# Altium PCB AX301_AX4010.PcbDoc (part 7 of 10)
Units mil, origin at the board's own origin, x right, y up, seen from the top; angles counter-clockwise.
Board outline 5185 x 3614 mil, 4 copper layers (Top Layer, GND, Mid-Layer 1, Bottom Layer); 191 components, 338 nets, 1108 pads, 420 vias.
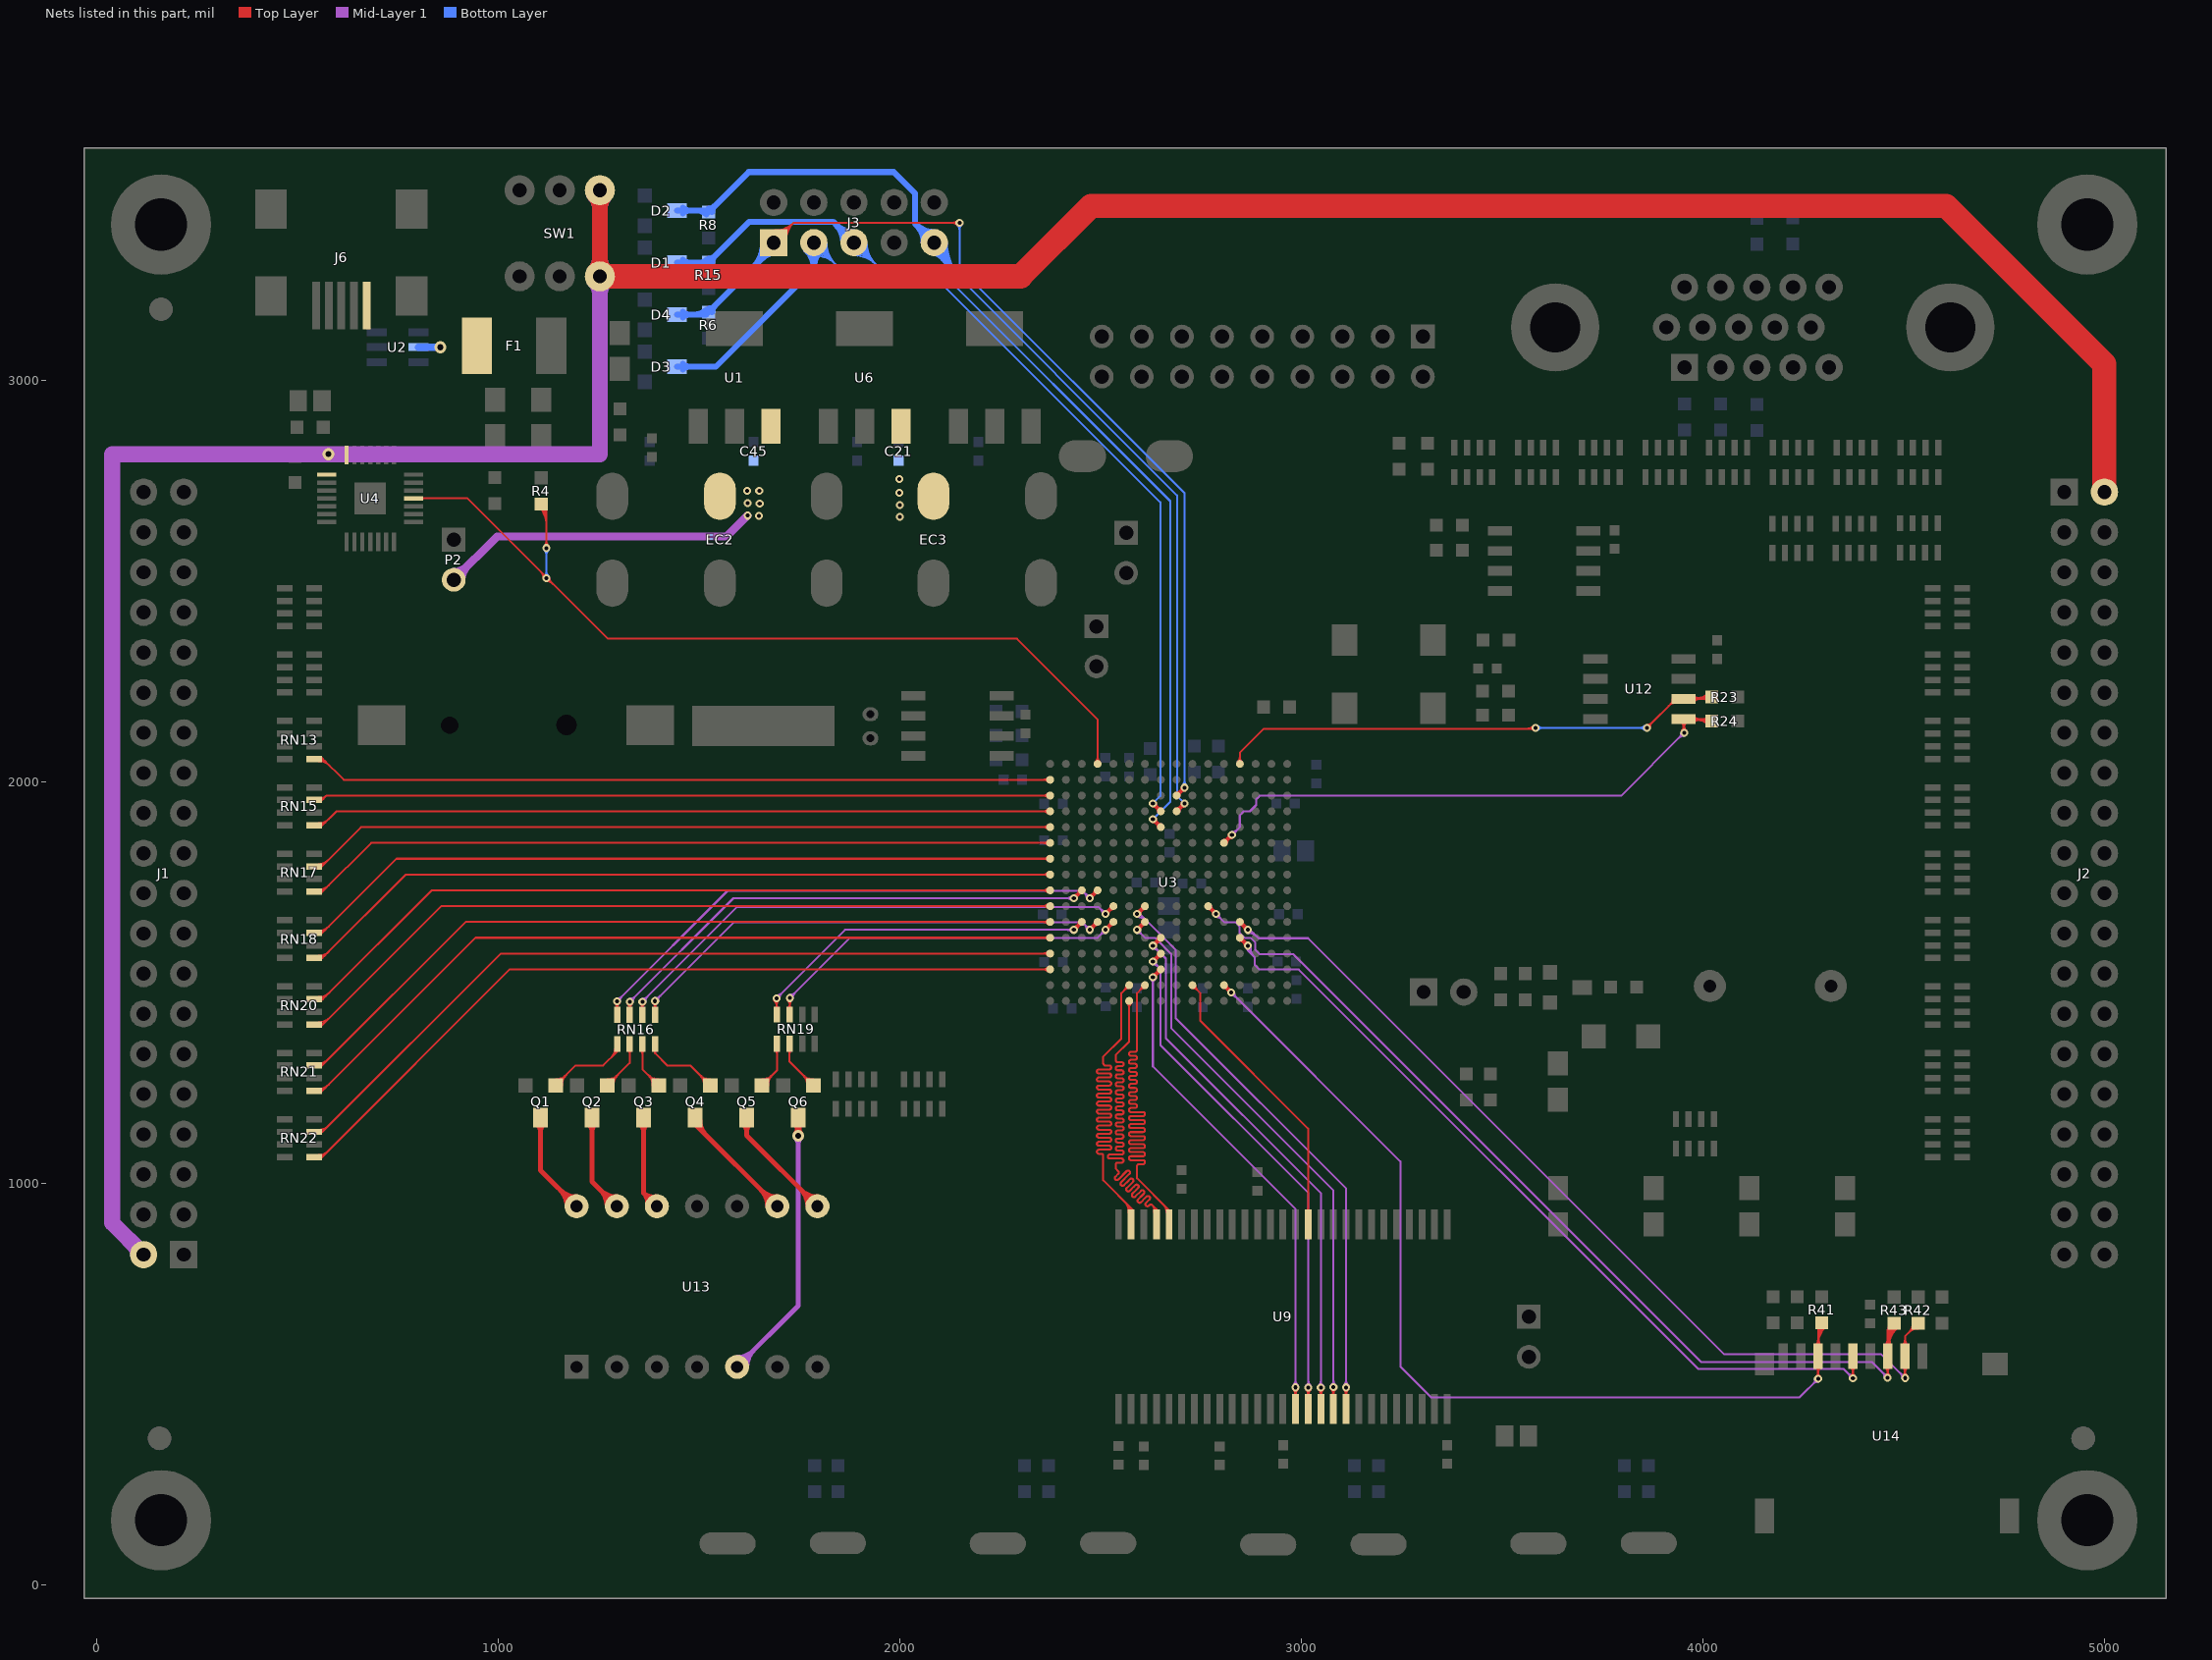
[diagram p9: the nets of this part, all layers, seen from the top]

## Via types
v1: diameter 20, hole 10, Top Layer to Bottom Layer, 377 vias
v2: diameter 30, hole 15, Top Layer to Bottom Layer, 41 vias
v3: diameter 40, hole 20, Top Layer to Bottom Layer, 2 vias

## Nets (pads, with @x,y where several pads share a name; then routed paths per layer and width w, separated by ;. In a path a pad name is that pad's centre, name@x,y a point inside that pad or via, vN(x,y) a via of type N, cw(c..) or ccw(c..) an arc to the next point about the centre after c; other vN are vias at no path point) (continued)
S_DB13: U3.K15 U9.50 | length 1413.3
  Top Layer w5: U3.K15@2603.6,1493.09 cw(c2585.88,1493.09) 2598.41,1480.56 cw(c2610.94,1468.03) U3.K15@2610.94,1485.75 ; U3.K15@2610.94,1493.09 2591,1473.15 2591,1332 cw(c2586,1332) 2586,1327 2576.12,1327 ccw(c2576.12,1322) 2571.12,1322 ccw(c2576.12,1322) 2576.12,1317 2586,1317 cw(c2586,1312) 2591,1312 cw(c2586,1312) 2586,1307 2576.12,1307 ccw(c2576.12,1302) 2571.12,1302 ccw(c2576.12,1302) 2576.12,1297 2586,1297 cw(c2586,1292) 2591,1292 cw(c2586,1292) 2586,1287 2576.12,1287 ccw(c2576.12,1282) 2571.12,1282 ccw(c2576.12,1282) 2576.12,1277 2586,1277 cw(c2586,1272) 2591,1272 cw(c2586,1272) 2586,1267 2576.12,1267 ccw(c2576.12,1262) 2571.12,1262 ccw(c2576.12,1262) 2576.12,1257 2586,1257 cw(c2586,1252) 2591,1252 cw(c2586,1252) 2586,1247 2576.12,1247 ccw(c2576.12,1242) 2571.12,1242 ccw(c2576.12,1242) 2576.12,1237 2586,1237 cw(c2586,1232) 2591,1232 cw(c2586,1232) 2586,1227 2576.12,1227 ccw(c2576.12,1222) 2571.12,1222 ccw(c2576.12,1222) 2576.12,1217 2586,1217 cw(c2586,1212) 2591,1212 cw(c2586,1212) 2586,1207 2576.12,1207 ccw(c2576.12,1202) 2571.12,1202 ccw(c2576.12,1202) 2576.12,1197 2586,1197 cw(c2586,1192) 2591,1192 cw(c2586,1192) 2586,1187 2576.12,1187 ccw(c2576.12,1182) 2571.12,1182 ccw(c2576.12,1182) 2576.12,1177 2605.88,1177 cw(c2605.88,1172) 2610.88,1172 cw(c2605.88,1172) 2605.88,1167 2576.12,1167 ccw(c2576.12,1162) 2571.12,1162 ccw(c2576.12,1162) 2576.12,1157 2605.88,1157 cw(c2605.88,1152) 2610.88,1152 cw(c2605.88,1152) 2605.88,1147 2576.12,1147 ccw(c2576.12,1142) 2571.12,1142 ccw(c2576.12,1142) 2576.12,1137 2605.88,1137 cw(c2605.88,1132) 2610.88,1132 cw(c2605.88,1132) 2605.88,1127 2576.12,1127 ccw(c2576.12,1122) 2571.12,1122 ccw(c2576.12,1122) 2576.12,1117 2605.88,1117 cw(c2605.88,1112) 2610.88,1112 cw(c2605.88,1112) 2605.88,1107 2576.12,1107 ccw(c2576.12,1102) 2571.12,1102 ccw(c2576.12,1102) 2576.12,1097 2605.88,1097 cw(c2605.88,1092) 2610.88,1092 cw(c2605.88,1092) 2605.88,1087 2576.12,1087 ccw(c2576.12,1082) 2571.12,1082 ccw(c2576.12,1082) 2576.12,1077 2605.88,1077 cw(c2605.88,1072) 2610.88,1072 cw(c2605.88,1072) 2605.88,1067 2576.12,1067 ccw(c2576.12,1062) 2571.12,1062 ccw(c2576.12,1062) 2576.12,1057 2605.88,1057 cw(c2605.88,1052) 2610.88,1052 cw(c2605.88,1052) 2605.88,1047 2596,1047 ccw(c2596,1042) 2591,1042 2591,1012 U9.50@2670.98,932.02 ; 2656.49,946.51 cw(c2635.98,926) U9.50@2664.98,926 ; 2665.02,937.98 cw(c2653.05,926) U9.50@2669.98,926 ; U9.50@2670.98,897 U9.50@2670.98,932.02 ; U9.50@2672,931 U9.50@2670.98,932.02
S_DB14: U3.L16 U9.51 | length 1418.6
  Top Layer w5: U3.L16@2566.38,1448.53 cw(c2553.85,1436) 2571.57,1436 cw(c2589.3,1436) U3.L16@2576.77,1448.53 ; U3.L16@2571.57,1453.72 2571.57,1352.57 2538,1319 2538,1306 ccw(c2543,1306) 2543,1301 2552.79,1301 cw(c2552.79,1296) 2557.79,1296 cw(c2552.79,1296) 2552.79,1291 2543,1291 ccw(c2543,1286) 2538,1286 ccw(c2543,1286) 2543,1281 2552.79,1281 cw(c2552.79,1276) 2557.79,1276 cw(c2552.79,1276) 2552.79,1271 2543,1271 ccw(c2543,1266) 2538,1266 ccw(c2543,1266) 2543,1261 2552.79,1261 cw(c2552.79,1256) 2557.79,1256 cw(c2552.79,1256) 2552.79,1251 2543,1251 ccw(c2543,1246) 2538,1246 ccw(c2543,1246) 2543,1241 2552.79,1241 cw(c2552.79,1236) 2557.79,1236 cw(c2552.79,1236) 2552.79,1231 2543,1231 ccw(c2543,1226) 2538,1226 ccw(c2543,1226) 2543,1221 2552.79,1221 cw(c2552.79,1216) 2557.79,1216 cw(c2552.79,1216) 2552.79,1211 2543,1211 ccw(c2543,1206) 2538,1206 ccw(c2543,1206) 2543,1201 2552.79,1201 cw(c2552.79,1196) 2557.79,1196 cw(c2552.79,1196) 2552.79,1191 2543,1191 ccw(c2543,1186) 2538,1186 ccw(c2543,1186) 2543,1181 2552.79,1181 cw(c2552.79,1176) 2557.79,1176 cw(c2552.79,1176) 2552.79,1171 2543,1171 ccw(c2543,1166) 2538,1166 ccw(c2543,1166) 2543,1161 2552.79,1161 cw(c2552.79,1156) 2557.79,1156 cw(c2552.79,1156) 2552.79,1151 2543,1151 ccw(c2543,1146) 2538,1146 ccw(c2543,1146) 2543,1141 2552.79,1141 cw(c2552.79,1136) 2557.79,1136 cw(c2552.79,1136) 2552.79,1131 2543,1131 ccw(c2543,1126) 2538,1126 ccw(c2543,1126) 2543,1121 2552.79,1121 cw(c2552.79,1116) 2557.79,1116 cw(c2552.79,1116) 2552.79,1111 2543,1111 ccw(c2543,1106) 2538,1106 ccw(c2543,1106) 2543,1101 2552.79,1101 cw(c2552.79,1096) 2557.79,1096 cw(c2552.79,1096) 2552.79,1091 2543,1091 ccw(c2543,1086) 2538,1086 ccw(c2543,1086) 2543,1081 2552.79,1081 cw(c2552.79,1076) 2557.79,1076 cw(c2552.79,1076) 2552.79,1071 2523.21,1071 ccw(c2523.21,1066) 2518.21,1066 ccw(c2523.21,1066) 2523.21,1061 2552.79,1061 cw(c2552.79,1056) 2557.79,1056 cw(c2552.79,1056) 2552.79,1051 2543,1051 ccw(c2543,1046) 2538,1046 2538,1036 2544.15,1029.85 cw(c2540.61,1026.32) 2544.15,1022.78 2537.23,1015.86 ccw(c2540.76,1012.33) 2537.23,1008.79 ccw(c2540.76,1012.33) 2544.3,1008.79 2565.21,1029.7 cw(c2568.74,1026.17) 2572.28,1029.7 cw(c2568.74,1026.17) 2572.28,1022.63 2551.37,1001.72 ccw(c2554.91,998.18) 2551.37,994.65 ccw(c2554.91,998.18) 2558.44,994.65 2568.9,1005.1 2573.45,1009.66 cw(c2576.99,1006.12) 2580.52,1009.66 cw(c2576.99,1006.12) 2580.52,1002.59 2565.51,987.58 ccw(c2569.05,984.04) 2565.51,980.51 ccw(c2569.05,984.04) 2572.58,980.51 2583.04,990.96 2586.78,994.7 cw(c2590.32,991.17) 2593.85,994.7 cw(c2590.32,991.17) 2593.85,987.63 2590.11,983.89 2579.65,973.44 ccw(c2583.19,969.9) 2579.65,966.36 ccw(c2583.19,969.9) 2586.73,966.36 2600.92,980.56 cw(c2604.46,977.03) 2607.99,980.56 cw(c2604.46,977.03) 2607.99,973.49 2604.25,969.75 2593.8,959.29 ccw(c2597.33,955.76) 2593.8,952.22 ccw(c2597.33,955.76) 2600.87,952.22 2611.32,962.68 2615.07,966.42 cw(c2618.6,962.88) 2622.14,966.42 cw(c2618.6,962.88) 2622.14,959.35 2613.47,950.68 ccw(c2617,947.14) 2613.47,943.61 ccw(c2617,947.14) 2620.54,943.61 2621.93,945 cw(c2625.46,941.46) 2629,945 ; U9.51@2633.69,927.54 ccw(c2616.21,932.2) 2629,945 ; 2635.13,938.87 cw(c2625.89,929.62) U9.51@2638.52,926.26 ; U9.51@2637.18,931.54 ccw(c2635.74,935) 2639.49,935 ; 2639,935 2629,945 ; U9.51@2639.49,897 2639.49,935 ; U9.51@2641.8,931.54 cw(c2643.24,935) 2639.49,935
S_DB15: U3.L15 U9.53 | length 1406.8
  Top Layer w5: 2558.12,955.88 cw(c2528.24,926) U9.53@2570.5,926 ; U3.L15@2564.23,1493.09 cw(c2546.51,1493.09) 2559.04,1480.56 cw(c2571.57,1468.03) U3.L15@2571.57,1485.75 ; 2566.65,947.35 cw(c2545.31,926) U9.53@2575.5,926 ; U3.L15@2571.57,1493.09 2552,1473.52 2552,1360 2507,1315 2507,1298 ccw(c2512,1298) 2512,1293 2521.93,1293 cw(c2521.93,1288) 2526.93,1288 cw(c2521.93,1288) 2521.93,1283 2496.07,1283 ccw(c2496.07,1278) 2491.07,1278 ccw(c2496.07,1278) 2496.07,1273 2521.93,1273 cw(c2521.93,1268) 2526.93,1268 cw(c2521.93,1268) 2521.93,1263 2496.07,1263 ccw(c2496.07,1258) 2491.07,1258 ccw(c2496.07,1258) 2496.07,1253 2521.93,1253 cw(c2521.93,1248) 2526.93,1248 cw(c2521.93,1248) 2521.93,1243 2496.07,1243 ccw(c2496.07,1238) 2491.07,1238 ccw(c2496.07,1238) 2496.07,1233 2521.93,1233 cw(c2521.93,1228) 2526.93,1228 cw(c2521.93,1228) 2521.93,1223 2496.07,1223 ccw(c2496.07,1218) 2491.07,1218 ccw(c2496.07,1218) 2496.07,1213 2521.93,1213 cw(c2521.93,1208) 2526.93,1208 cw(c2521.93,1208) 2521.93,1203 2496.07,1203 ccw(c2496.07,1198) 2491.07,1198 ccw(c2496.07,1198) 2496.07,1193 2521.93,1193 cw(c2521.93,1188) 2526.93,1188 cw(c2521.93,1188) 2521.93,1183 2496.07,1183 ccw(c2496.07,1178) 2491.07,1178 ccw(c2496.07,1178) 2496.07,1173 2521.93,1173 cw(c2521.93,1168) 2526.93,1168 cw(c2521.93,1168) 2521.93,1163 2496.07,1163 ccw(c2496.07,1158) 2491.07,1158 ccw(c2496.07,1158) 2496.07,1153 2521.93,1153 cw(c2521.93,1148) 2526.93,1148 cw(c2521.93,1148) 2521.93,1143 2496.07,1143 ccw(c2496.07,1138) 2491.07,1138 ccw(c2496.07,1138) 2496.07,1133 2521.93,1133 cw(c2521.93,1128) 2526.93,1128 cw(c2521.93,1128) 2521.93,1123 2496.07,1123 ccw(c2496.07,1118) 2491.07,1118 ccw(c2496.07,1118) 2496.07,1113 2521.93,1113 cw(c2521.93,1108) 2526.93,1108 cw(c2521.93,1108) 2521.93,1103 2496.07,1103 ccw(c2496.07,1098) 2491.07,1098 ccw(c2496.07,1098) 2496.07,1093 2521.93,1093 cw(c2521.93,1088) 2526.93,1088 cw(c2521.93,1088) 2521.93,1083 2496.07,1083 ccw(c2496.07,1078) 2491.07,1078 ccw(c2496.07,1078) 2496.07,1073 2502,1073 cw(c2502,1068) 2507,1068 2507,1007 U9.53@2581,933 ; 2575.19,938.81 cw(c2562.38,926) U9.53@2580.5,926
S_DQM0: U3.J14 U9.15 | length 1392.5
  Top Layer w6: v1@2981.05,486.05 cw(c2969.23,474.23) U9.15@2985.94,474.23 ; U9.15@2982.06,469.89 ccw(c2972.67,479.28) 2985.94,479.28 ccw(c2999.22,479.28) U9.15@2989.83,469.89 ; U9.15@2985.94,437 2985.94,490.94 v1(2986,491) ; U9.15@2985.94,473.97 cw(c3003.03,473.97) v1@2990.95,486.05
  Top Layer w10: v1(2630.63,1512.78) U3.J14@2650.32,1532.46 ; v1@2630.63,1517.78 ccw(c2630.63,1529.85) 2639.16,1521.31 ccw(c2647.7,1512.78) v1@2635.63,1512.78 ; U3.J14@2645.47,1532.46 cw(c2633.78,1532.46) 2642.05,1524.2 cw(c2650.32,1515.93) U3.J14@2650.32,1527.62
  Mid-Layer 1 w5: v1@2625.33,1507.48 cw(c2612.52,1494.67) 2630.63,1494.67 cw(c2648.74,1494.67) v1@2635.93,1507.48 ; v1(2630.63,1512.78) 2630.63,1290.37 2986,935 v1(2986,491) ; v1@2980.7,496.3 ccw(c2967.89,509.11) 2986,509.11 ccw(c3004.11,509.11) v1@2991.3,496.3
S_DQM1: U3.G15 U9.39 | length 766.1
  Top Layer w5: U3.G15@2729.06,1485.75 cw(c2729.06,1468.03) 2741.59,1480.56 cw(c2754.12,1493.09) U3.G15@2736.4,1493.09 ; U3.G15@2729.06,1493.09 2749,1473.15 2749,1404 3017.44,1135.56 U9.39@3017.44,897 ; U9.39@3013.2,930.24 ccw(c3002.96,940.49) 3017.44,940.49 ccw(c3031.93,940.49) U9.39@3021.68,930.24
S_NCAS: U3.J12 U9.17 | length 1497.3
  Top Layer w6: v1@3044.05,485.45 cw(c3032.25,473.65) U9.17@3048.94,473.65 ; U9.17@3045.05,469.89 ccw(c3035.66,479.28) 3048.94,479.28 ccw(c3062.22,479.28) U9.17@3052.83,469.89 ; U9.17@3048.94,437 3048.94,490.34 v1(3049,490.4) ; U9.17@3048.94,473.35 cw(c3066.05,473.35) v1@3053.95,485.45
  Top Layer w10: v1(2630.63,1591.52) U3.J12@2650.32,1611.2 ; v1@2630.63,1596.52 ccw(c2630.63,1608.59) 2639.16,1600.05 ccw(c2647.7,1591.52) v1@2635.63,1591.52 ; U3.J12@2645.47,1611.2 cw(c2633.78,1611.2) 2642.05,1602.94 cw(c2650.32,1594.67) U3.J12@2650.32,1606.36
  Mid-Layer 1 w5: v1@2630.63,1584.02 cw(c2630.63,1565.91) 2643.43,1578.72 cw(c2656.24,1591.52) v1@2638.13,1591.52 ; v1(2630.63,1591.52) 2663,1559.15 2663,1361 3049,975 v1(3049,490.4) ; v1@3043.7,495.7 ccw(c3030.89,508.51) 3049,508.51 ccw(c3067.11,508.51) v1@3054.3,495.7
S_NCS: U3.K10 U9.19 | length 1641.7
  Top Layer w6: v1@3106.98,485.98 cw(c3095.03,474.03) 3111.93,474.03 cw(c3128.83,474.03) v1@3116.88,485.98 ; U9.19@3108.04,469.89 ccw(c3098.65,479.28) 3111.93,479.28 ccw(c3125.21,479.28) U9.19@3115.82,469.89 ; U9.19@3111.93,437 v1(3111.93,490.93)
  Top Layer w10: v1(2591.26,1670.26) U3.K10@2610.94,1689.94 ; v1@2591.26,1675.26 ccw(c2591.26,1687.33) 2599.79,1678.79 ccw(c2608.33,1670.26) v1@2596.26,1670.26 ; U3.K10@2606.1,1689.94 cw(c2594.41,1689.94) 2602.68,1681.68 cw(c2610.94,1673.41) U3.K10@2610.94,1685.1
  Mid-Layer 1 w5: v1@2591.26,1662.76 cw(c2591.26,1626.59) 2616.84,1652.16 ; v1@2591.26,1667.76 cw(c2591.26,1643.66) 2608.3,1660.7 ; v1(2591.26,1670.26) 2598.74,1670.26 2688,1581 2688,1410 3111.93,986.07 v1(3111.93,490.93) ; v1@3106.63,496.23 ccw(c3093.82,509.04) 3111.93,509.04 ccw(c3130.04,509.04) v1@3117.23,496.23
S_NRAS: U3.K11 U9.18 | length 1580.5
  Top Layer w6: v1@3075.48,486.48 cw(c3063.53,474.53) 3080.43,474.53 cw(c3097.33,474.53) v1@3085.38,486.48 ; U9.18@3076.54,469.89 ccw(c3067.15,479.28) 3080.43,479.28 ccw(c3093.71,479.28) U9.18@3084.32,469.89 ; U9.18@3080.43,437 v1(3080.43,491.43)
  Top Layer w10: v1(2591.26,1630.89) U3.K11@2610.94,1650.57 ; v1@2591.26,1635.89 ccw(c2591.26,1647.96) 2599.79,1639.42 ccw(c2608.33,1630.89) v1@2596.26,1630.89 ; U3.K11@2606.1,1650.57 cw(c2594.41,1650.57) 2602.68,1642.31 cw(c2610.94,1634.04) U3.K11@2610.94,1645.73
  Mid-Layer 1 w5: v1@2591.26,1623.39 cw(c2591.26,1605.28) 2604.06,1618.09 cw(c2616.87,1630.89) v1@2598.76,1630.89 ; v1(2591.26,1630.89) 2611.15,1611 2636,1611 2676,1571 2676,1386 3080.43,981.57 v1(3080.43,491.43) ; v1@3075.13,496.74 ccw(c3062.33,509.54) 3080.43,509.54 ccw(c3098.54,509.54) v1@3085.74,496.74
S_NWE: U3.J13 U9.16 | length 1445.3
  Top Layer w6: v1@3013.05,485.45 cw(c3002.45,474.85) 3017.44,474.85 ; U9.16@3013.55,469.89 ccw(c3004.16,479.28) 3017.44,479.28 ccw(c3030.72,479.28) U9.16@3021.33,469.89 ; U9.16@3017.44,437 3017.44,489.84 v1(3018,490.4) ; U9.16@3017.44,472.15 cw(c3036.25,472.15) v1@3022.95,485.45
  Top Layer w10: v1(2630.63,1552.15) U3.J13@2650.32,1571.83 ; v1@2630.63,1557.15 ccw(c2630.63,1569.22) 2639.16,1560.68 ccw(c2647.7,1552.15) v1@2635.63,1552.15 ; U3.J13@2645.47,1571.83 cw(c2633.78,1571.83) 2642.05,1563.57 cw(c2650.32,1555.3) U3.J13@2650.32,1566.99
  Mid-Layer 1 w5: v1@2630.63,1544.65 cw(c2630.63,1526.54) 2643.43,1539.35 cw(c2656.24,1552.15) v1@2638.13,1552.15 ; v1(2630.63,1552.15) 2649,1533.78 2649,1344 3018,975 v1(3018,490.4) ; v1@3012.7,495.7 ccw(c2999.89,508.51) 3018,508.51 ccw(c3036.11,508.51) v1@3023.3,495.7
SCL: R23.2 U3.D1 U12.6 | length 1638.2
  Top Layer w5: U3.D1@2841.97,2049.47 ccw(c2829.44,2062) 2847.17,2062 ccw(c2864.89,2062) U3.D1@2852.36,2049.47 ; U3.D1@2847.17,2044.28 2847.17,2072.17 2907,2132 v1@3584,2132 ; 3561.06,2132 ccw(c3561.06,2156.93) v1@3578.7,2139.3 ; 3570.72,2132 cw(c3570.72,2120.72) v1@3578.7,2128.7 ; 3573.14,2132 ccw(c3573.14,2144.86) v1@3582.23,2135.77 ; v1(3861,2134) 3933,2206 U12.6@3953,2206 R23.2@4023,2206 ; v1@3861,2141.5 ccw(c3861,2159.61) 3873.8,2146.8 ccw(c3886.61,2134) v1@3868.5,2134 ; 3915.37,2188.37 cw(c3935,2168.74) U12.6@3935,2196.5 ; 3920.2,2193.2 ccw(c3907.39,2206) U12.6@3925.5,2206 ; U12.6@3923.9,2196.9 cw(c3935,2185.81) U12.6@3935,2201.5 ; U12.6@3973.82,2209.51 ccw(c3981.37,2218.93) 3983.76,2207.1 ; U12.6@3976.94,2213.41 ccw(c3990.08,2229.79) 3994.23,2209.21 ; U12.6@3977.72,2199.28 cw(c3993.94,2183.07) 3993.94,2206 cw(c3993.94,2228.93) U12.6@3977.72,2212.72 ; U12.6@3978.34,2206 ccw(c3978.34,2255.66) R23.2@4013.45,2220.55 ; U12.6@3978.91,2200.75 cw(c3993.89,2190.8) 3990.33,2208.42 ; 3990.41,2206 ccw(c3990.41,2243.59) R23.2@4016.99,2217.01 ; R23.2@4013.45,2201.45 ccw(c4002.48,2190.48) 4002.48,2206 ccw(c4002.48,2231.52) R23.2@4020.53,2213.47
  Bottom Layer w5: v1(3584,2134) v1(3861,2134) ; v1@3589.3,2128.7 cw(c3602.11,2115.89) 3602.11,2134 cw(c3602.11,2152.11) v1@3589.3,2139.3 ; v1@3855.7,2128.7 ccw(c3842.89,2115.89) 3842.89,2134 ccw(c3842.89,2152.11) v1@3855.7,2139.3
SD_CLK: U3.D12 U14.5 | length 2269.3
  Top Layer w5: U14.5@4367.77,542.55 cw(c4351.88,526.66) 4374.35,526.66 cw(c4396.83,526.66) U14.5@4380.94,542.55 ; v1@4369.05,518.95 ccw(c4356.25,531.75) 4374.35,531.75 ccw(c4392.46,531.75) v1@4379.66,518.95 ; v1(4374.35,513.65) U14.5@4374.35,568.82
  Top Layer w10: U3.D12@2847.17,1606.36 cw(c2847.17,1594.67) 2855.43,1602.94 cw(c2863.7,1611.2) U3.D12@2852.01,1611.2 ; U3.D12@2847.17,1611.2 v1(2866.85,1591.52) ; v1@2861.85,1591.52 ccw(c2849.78,1591.52) 2858.32,1600.05 ccw(c2866.85,1608.59) v1@2866.85,1596.52
  Mid-Layer 1 w5: v1@2863.57,1584.78 cw(c2861,1579.52) 2866.85,1579.52 ; v1@2864.37,1591.79 ccw(c2882.7,1589.76) 2869.66,1576.71 ; v1(2866.85,1591.52) 2866.85,1579.52 ; v1@2869.34,1591.24 ccw(c2895.94,1588.29) 2877.01,1569.36 ; v1@2870.14,1584.78 ccw(c2872.7,1579.52) 2866.85,1579.52 ; v1@2874.31,1590.69 ccw(c2909.18,1586.81) 2884.37,1562 ; v1@4366.85,513.65 ccw(c4348.75,513.65) 4361.55,526.45 ccw(c4374.35,539.25) v1@4374.35,521.15 ; v1(4374.35,513.65) 4351,537 3989,537 2994,1532 2896,1532 2884.37,1543.63 2884.37,1562 ; 2866.85,1579.52 2884.37,1562
SD_DIN: R43.2 U3.F10 U14.3 | length 2893.2
  Top Layer w5: U14.3@4454.39,542.55 cw(c4438.49,526.66) 4460.97,526.66 cw(c4483.45,526.66) U14.3@4467.55,542.55 ; U14.3@4454.39,595.09 ccw(c4438.49,610.98) 4460.97,610.98 ccw(c4483.45,610.98) U14.3@4467.55,595.09 ; U14.3@4455.5,596.04 ccw(c4443.31,612.81) 4463.79,609.56 ; v1@4455.67,520.27 ccw(c4442.86,533.08) 4460.97,533.08 ccw(c4479.08,533.08) v1@4466.27,520.27 ; U14.3@4455.87,596.3 ccw(c4440.2,620.26) 4468.22,614.39 ; U14.3@4458.61,592.11 ccw(c4449.55,605.97) 4465.75,602.58 ; v1(4460.97,514.97) U14.3@4460.97,568.82 4460.97,634.97 ; U14.3@4460.97,579.71 cw(c4548.29,579.71) R43.2@4486.55,641.45 ; U14.3@4460.97,591.78 cw(c4536.22,591.78) R43.2@4483.01,644.99 ; 4460.97,603.85 cw(c4524.15,603.85) R43.2@4479.47,648.53 ; 4460.97,615.92 cw(c4512.08,615.92) R43.2@4475.94,652.06 ; 4460.97,627.99 cw(c4500.01,627.99) R43.2@4472.4,655.6 ; R43.2@4464.06,647.16 cw(c4452.28,643.66) 4460.97,634.97 ; 4464.17,612.01 ccw(c4488.1,608.22) U14.3@4468.5,593.98 ; 4466.44,605.88 ccw(c4482.43,602.54) U14.3@4468.76,593.6 ; R43.2@4473.16,638.06 ccw(c4469.66,626.28) 4460.97,634.97 ; R43.2@4477,651 4460.97,634.97
  Top Layer w10: U3.F10@2768.43,1685.1 cw(c2768.43,1673.41) 2776.69,1681.68 cw(c2784.96,1689.94) U3.F10@2773.27,1689.94 ; U3.F10@2768.43,1689.94 v1(2788.11,1670.26) ; v1@2783.11,1670.26 ccw(c2771.04,1670.26) 2779.58,1678.79 ccw(c2788.11,1687.33) v1@2788.11,1675.26
  Mid-Layer 1 w5: v1@2788.11,1662.76 cw(c2788.11,1644.65) 2800.91,1657.46 cw(c2813.72,1670.26) v1@2795.61,1670.26 ; v1(2788.11,1670.26) 2808.37,1650 2836,1650 2846,1640 2846,1624 2859,1611 2874,1611 2885,1600 2885,1582 2897,1570 2981,1570 3997,554 4421.94,554 v1(4460.97,514.97) ; v1@4453.47,514.97 ccw(c4435.36,514.97) 4448.17,527.77 ccw(c4460.97,540.58) v1@4460.97,522.47
SD_DOUT: R41.2 U3.E15 U14.7 | length 2811.6
  Top Layer w5: U3.E15@2807.8,1485.75 cw(c2807.8,1468.03) 2820.33,1480.56 cw(c2832.86,1493.09) U3.E15@2815.14,1493.09 ; U3.E15@2807.8,1493.09 v1(2826,1474.89) ; U3.E15@2811.35,1485.75 cw(c2804.13,1473.25) v1@2818.52,1474.33 ; U3.E15@2815.14,1489.54 ccw(c2827.64,1496.76) v1@2826.56,1482.37 ; 2815.7,1483.24 ccw(c2821.21,1492.78) v1@2824.06,1482.13 ; 2817.65,1485.19 cw(c2808.11,1479.68) v1@2818.76,1476.83 ; v1@2818.5,1474.89 ccw(c2800.39,1474.89) 2813.2,1487.69 ccw(c2826,1500.5) v1@2826,1482.39 ; U14.7@4281.16,542.55 cw(c4265.26,526.66) 4287.74,526.66 cw(c4310.22,526.66) U14.7@4294.32,542.55 ; U14.7@4281.16,595.09 ccw(c4265.26,610.98) 4287.74,610.98 ccw(c4310.22,610.98) U14.7@4294.32,595.09 ; U14.7@4282.16,595.96 ccw(c4271.17,610.63) 4289.32,608.02 ; v1@4282.44,517.56 ccw(c4269.63,530.37) 4287.74,530.37 ccw(c4305.85,530.37) v1@4293.04,517.56 ; v1(4287.74,512.26) U14.7@4287.74,568.82 4287.74,642.74 R41.2@4297,652 ; U14.7@4287.74,597.05 cw(c4351.95,597.05) R41.2@4306.55,642.45 ; 4287.74,609.12 cw(c4339.88,609.12) R41.2@4303.01,645.99 ; 4287.74,621.19 cw(c4327.81,621.19) R41.2@4299.47,649.53 ; 4287.74,633.27 cw(c4315.73,633.27) R41.2@4295.94,653.06 ; 4288.22,600.41 ccw(c4299.28,598.82) U14.7@4290.95,591.38 ; 4289.75,611.03 ccw(c4309.71,608.16) U14.7@4294.68,594.71
  Mid-Layer 1 w5: v1@2826,1467.39 cw(c2826,1449.28) 2838.8,1462.09 cw(c2851.61,1474.89) v1@2833.5,1474.89 ; v1(2826,1474.89) 3247,1053.89 3247,543 3324,466 4241.48,466 v1(4287.74,512.26) ; v1@4280.24,512.26 cw(c4262.13,512.26) 4274.94,499.46 cw(c4287.74,486.65) v1@4287.74,504.76
SD_NCS: R42.2 U3.D11 U14.2 | length 2569
  Top Layer w5: U14.2@4497.69,542.55 cw(c4481.8,526.66) 4504.28,526.66 cw(c4526.75,526.66) U14.2@4510.86,542.55 ; U14.2@4497.69,595.09 ccw(c4481.8,610.98) 4504.28,610.98 ccw(c4526.75,610.98) U14.2@4510.86,595.09 ; v1@4498.97,519.58 ccw(c4486.17,532.38) 4504.28,532.38 ccw(c4522.38,532.38) v1@4509.58,519.58 ; v1(4504.28,514.28) U14.2@4504.28,568.82 4504.28,618.28 R42.2@4537,651 ; R42.2@4523.5,651 cw(c4490.91,651) 4513.95,627.95 cw(c4537,604.91) R42.2@4537,637.5 ; R42.2@4528.5,651 cw(c4507.98,651) 4522.49,636.49 cw(c4537,621.98) R42.2@4537,642.5
  Top Layer w10: U3.D11@2847.17,1645.73 cw(c2847.17,1634.04) 2855.43,1642.31 cw(c2863.7,1650.57) U3.D11@2852.01,1650.57 ; U3.D11@2847.17,1650.57 v1(2866.85,1630.89) ; v1@2861.85,1630.89 ccw(c2849.78,1630.89) 2858.32,1639.42 ccw(c2866.85,1647.96) v1@2866.85,1635.89
  Mid-Layer 1 w5: v1@2866.85,1623.39 cw(c2866.85,1590.17) 2890.34,1613.66 ; v1@2866.85,1628.39 cw(c2866.85,1607.24) 2881.81,1622.19 ; v1(2866.85,1630.89) 2873.11,1630.89 2894,1610 3017,1610 4053,574 4444.55,574 v1(4504.28,514.28) ; v1@4496.78,514.28 ccw(c4478.67,514.28) 4491.47,527.08 ccw(c4504.28,539.88) v1@4504.28,521.78
SDA: R24.2 U3.E6 U12.5 | length 1762.4
  Top Layer w5: U12.5@3946.28,2149.28 cw(c3927.65,2130.65) v1@3954,2130.65 ; v1@3948.38,2126.97 ccw(c3937.74,2136.4) 3951.47,2140.08 ; v1@3948.7,2127.3 ccw(c3935.89,2140.11) 3954,2140.11 ccw(c3972.11,2140.11) v1@3959.3,2127.3 ; U12.5@3949.82,2152.82 cw(c3939.72,2142.72) 3954,2142.72 ; 3952.88,2134.85 ccw(c3962.98,2137.56) v1@3957.75,2128.5 ; U12.5@3953,2156 4018,2156 R24.2@4023,2151 ; v1(3954,2122) U12.5@3954,2155 ; 3954,2135.48 cw(c3973.52,2135.48) U12.5@3959.72,2149.28 ; U12.5@3973.82,2152.49 cw(c3981.37,2143.07) 3983.76,2154.9 ; U12.5@3976.94,2148.59 cw(c3990.08,2132.21) 3994.23,2152.79 ; U12.5@3977.72,2149.28 cw(c3993.94,2133.07) 3993.94,2156 cw(c3993.94,2178.93) U12.5@3977.72,2162.72 ; U12.5@3978.34,2156 cw(c3978.34,2106.34) R24.2@4013.45,2141.45 ; U12.5@3978.91,2161.25 ccw(c3993.89,2171.2) 3990.33,2153.58 ; 3990.41,2156 cw(c3990.41,2118.41) R24.2@4016.99,2144.99 ; R24.2@4013.45,2160.55 cw(c4002.48,2171.52) 4002.48,2156 cw(c4002.48,2130.48) R24.2@4020.53,2148.53
  Top Layer w10: U3.E6@2807.8,1847.43 v1(2827.48,1867.11) ; U3.E6@2807.8,1852.27 ccw(c2807.8,1863.96) 2816.06,1855.69 ccw(c2824.33,1847.43) U3.E6@2812.64,1847.43 ; v1@2822.48,1867.11 cw(c2810.41,1867.11) 2818.95,1858.58 cw(c2827.48,1850.04) v1@2827.48,1862.11
  Mid-Layer 1 w5: v1(2827.48,1867.11) 2847,1886.63 2847,1916 2857,1926 2872,1926 2888,1942 2888,1956 2897,1965 3797,1965 v1(3954,2122) ; v1@2827.48,1874.61 ccw(c2827.48,1892.72) 2840.28,1879.91 ccw(c2853.09,1867.11) v1@2834.98,1867.11 ; v1@3946.5,2122 cw(c3928.39,2122) 3941.2,2109.2 cw(c3954,2096.39) v1@3954,2114.5
SEL0: RN16.8 U3.N9 | length 1527.9
  Top Layer w5: v1@1290.7,1447.7 cw(c1277.89,1434.89) 1296,1434.89 cw(c1314.11,1434.89) v1@1301.3,1447.7 ; RN16.8@1292.2,1434.76 ccw(c1283.03,1443.93) 1296,1443.93 ccw(c1308.97,1443.93) RN16.8@1299.8,1434.76 ; v1@1292.67,1446.28 cw(c1289.25,1439.38) 1296.69,1441.37 cw(c1300.58,1442.42) v1@1298.98,1446.12 ; v1@1293.02,1446.12 cw(c1291.42,1442.42) 1295.31,1441.37 cw(c1302.75,1439.38) v1@1299.33,1446.28 ; RN16.8@1296,1419.15 v1(1296,1453)
  Top Layer w10: v1(2473.15,1709.63) U3.N9@2492.83,1729.32 ; v1@2473.15,1714.63 ccw(c2473.15,1726.7) 2481.68,1718.16 ccw(c2490.22,1709.63) v1@2478.15,1709.63 ; U3.N9@2487.99,1729.32 cw(c2476.3,1729.32) 2484.57,1721.05 cw(c2492.83,1712.78) U3.N9@2492.83,1724.47
  Mid-Layer 1 w5: v1(1296,1453) 1571,1728 2454.78,1728 v1(2473.15,1709.63) ; v1@1296,1460.5 ccw(c1296,1478.61) 1308.8,1465.8 ccw(c1321.61,1453) v1@1303.5,1453 ; v1@2465.65,1709.63 ccw(c2447.54,1709.63) 2460.35,1722.43 ccw(c2473.15,1735.24) v1@2473.15,1717.13
SEL0_T: Q1.1 RN16.1 | length 339.2
  Top Layer w5: Q1.1@1143,1243 1193,1293 1261,1293 1296,1328 RN16.1@1296,1346 ; Q1.1@1143,1253.5 ccw(c1143,1278.85) 1160.92,1260.92 ccw(c1178.85,1243) Q1.1@1153.5,1243 ; Q1.1@1143,1258.5 ccw(c1143,1295.92) 1169.46,1269.46 ccw(c1195.92,1243) Q1.1@1158.5,1243 ; 1282.45,1314.45 ccw(c1262.71,1334.19) RN16.1@1290.63,1334.19 ; 1290.99,1322.99 ccw(c1279.78,1334.19) RN16.1@1295.63,1334.19
SEL0_TT: Q1.3 U13.14 | length 394.8
  Top Layer w12: Q1.3@1096.51,1147.51 cw(c1076.03,1127.03) 1105,1127.03 cw(c1133.97,1127.03) Q1.3@1113.49,1147.51 ; Q1.3@1105,1163 1105,1032 U13.14@1195,942 ; U13.14@1171,942 ccw(c1113.06,942) 1154.03,982.97 ccw(c1195,1023.94) U13.14@1195,966
SEL1: RN16.7 U3.P9 | length 1436.3
  Top Layer w5: v1@1322.19,1446.2 cw(c1309.39,1433.4) 1327.5,1433.4 cw(c1345.6,1433.4) v1@1332.8,1446.2 ; RN16.7@1323.7,1434.76 ccw(c1314.52,1443.93) 1327.5,1443.93 ccw(c1340.47,1443.93) RN16.7@1331.3,1434.76 ; v1@1324.72,1444.54 cw(c1323.54,1441.56) 1326.64,1440.73 cw(c1331.92,1439.31) v1@1330.06,1444.45 ; v1@1324.94,1444.45 cw(c1323.07,1439.31) 1328.36,1440.73 cw(c1331.45,1441.56) v1@1330.27,1444.54 ; RN16.7@1327.5,1419.15 v1(1327.5,1451.5)
  Top Layer w10: v1(2433.78,1709.63) U3.P9@2453.46,1729.32 ; v1@2433.78,1714.63 ccw(c2433.78,1726.7) 2442.31,1718.16 ccw(c2450.85,1709.63) v1@2438.78,1709.63 ; U3.P9@2448.62,1729.32 cw(c2436.93,1729.32) 2445.2,1721.05 cw(c2453.46,1712.78) U3.P9@2453.46,1724.47
  Mid-Layer 1 w5: v1(1327.5,1451.5) 1585.62,1709.63 v1(2433.78,1709.63) ; v1@1327.5,1459 ccw(c1327.5,1477.11) 1340.3,1464.31 ccw(c1353.1,1451.5) v1@1335,1451.5 ; v1@2428.48,1704.33 ccw(c2415.67,1691.52) 2415.67,1709.63 ccw(c2415.67,1727.74) v1@2428.48,1714.93
SEL1_T: Q2.1 RN16.2 | length 245.2
  Top Layer w5: Q2.1@1271.4,1243 1327.5,1299.1 RN16.2@1327.5,1346 ; Q2.1@1271.4,1253.5 ccw(c1271.4,1278.85) 1289.32,1260.92 ccw(c1307.25,1243) Q2.1@1281.9,1243 ; Q2.1@1271.4,1258.5 ccw(c1271.4,1295.92) 1297.86,1269.46 ccw(c1324.32,1243) Q2.1@1286.9,1243 ; RN16.2@1323.7,1330.39 cw(c1314.52,1321.22) 1327.5,1321.22 cw(c1340.47,1321.22) RN16.2@1331.3,1330.39
SEL1_TT: Q2.3 U13.13 | length 383
  Top Layer w12: Q2.3@1224.91,1147.51 cw(c1204.43,1127.03) 1233.4,1127.03 cw(c1262.37,1127.03) Q2.3@1241.89,1147.51 ; Q2.3@1233.4,1163 1233.4,1003.6 U13.13@1295,942 ; U13.13@1271,942 ccw(c1213.06,942) 1254.03,982.97 ccw(c1295,1023.94) U13.13@1295,966
SEL2: RN16.6 U3.M10 | length 1483.7
  Top Layer w5: v1@1353.69,1446.69 cw(c1340.89,1433.89) 1358.99,1433.89 cw(c1377.1,1433.89) v1@1364.3,1446.69 ; RN16.6@1355.19,1434.76 ccw(c1346.02,1443.93) 1358.99,1443.93 ccw(c1371.97,1443.93) RN16.6@1362.79,1434.76 ; RN16.6@1358.99,1419.15 v1(1358.99,1451.99) ; v1@1361.81,1445.04 ccw(c1364.13,1439.35) 1358.19,1440.94 ccw(c1354.83,1441.84) 1356.15,1445.05 cw(c1353.85,1439.35) 1359.8,1440.94 cw(c1363.15,1441.84) v1@1361.83,1445.05
  Top Layer w10: v1(2512.52,1670.26) U3.M10@2532.2,1689.94 ; v1@2512.52,1675.26 ccw(c2512.52,1687.33) 2521.05,1678.79 ccw(c2529.59,1670.26) v1@2517.52,1670.26 ; U3.M10@2527.36,1689.94 cw(c2515.67,1689.94) 2523.94,1681.68 cw(c2532.2,1673.41) U3.M10@2532.2,1685.1
  Mid-Layer 1 w5: v1(1358.99,1451.99) 1595,1688 2494.78,1688 v1(2512.52,1670.26) ; v1@1358.99,1459.49 ccw(c1358.99,1477.6) 1371.8,1464.8 ccw(c1384.6,1451.99) v1@1366.49,1451.99 ; v1@2505.02,1670.26 ccw(c2486.91,1670.26) 2499.72,1683.06 ccw(c2512.52,1695.87) v1@2512.52,1677.76
SEL2_T: Q3.1 RN16.3 | length 238.9
  Top Layer w5: RN16.3@1355.19,1330.39 cw(c1346.02,1321.22) 1358.99,1321.22 cw(c1371.97,1321.22) RN16.3@1362.79,1330.39 ; RN16.3@1358.99,1346 1358.99,1283.81 Q3.1@1399.8,1243 ; Q3.1@1384.3,1243 ccw(c1346.88,1243) 1373.34,1269.46 ccw(c1399.8,1295.92) Q3.1@1399.8,1258.5 ; Q3.1@1389.3,1243 ccw(c1363.95,1243) 1381.88,1260.92 ccw(c1399.8,1278.85) Q3.1@1399.8,1253.5
SEL2_TT: Q3.3 U13.12 | length 344.4
  Top Layer w12: Q3.3@1353.31,1147.51 cw(c1332.83,1127.03) 1361.8,1127.03 cw(c1390.77,1127.03) Q3.3@1370.29,1147.51 ; Q3.3@1361.8,1163 1361.8,975.2 ; U13.12@1371.31,945.82 ccw(c1337.82,951.21) 1361.8,975.2 ; U13.12@1391.18,965.69 cw(c1385.79,999.18) 1361.8,975.2 ; U13.12@1395,942 1361.8,975.2
SEL3: RN16.5 U3.N11 | length 1403.3
  Top Layer w5: v1@1385.18,1448.18 cw(c1372.38,1435.38) 1390.49,1435.38 cw(c1408.59,1435.38) v1@1395.79,1448.18 ; RN16.5@1386.69,1434.76 ccw(c1377.51,1443.93) 1390.49,1443.93 ccw(c1403.46,1443.93) RN16.5@1394.29,1434.76 ; v1@1386.93,1446.89 cw(c1382.87,1439.38) 1391.12,1441.59 cw(c1395.27,1442.7) v1@1393.53,1446.63 ; v1@1387.45,1446.63 cw(c1385.7,1442.7) 1389.86,1441.58 cw(c1398.1,1439.38) v1@1394.05,1446.89 ; RN16.5@1390.49,1419.15 v1(1390.49,1453.49)
  Top Layer w10: v1(2473.15,1630.89) U3.N11@2492.83,1650.57 ; v1@2473.15,1635.89 ccw(c2473.15,1647.96) 2481.68,1639.42 ccw(c2490.22,1630.89) v1@2478.15,1630.89 ; U3.N11@2487.99,1650.57 cw(c2476.3,1650.57) 2484.57,1642.31 cw(c2492.83,1634.04) U3.N11@2492.83,1645.73
  Mid-Layer 1 w5: v1(1390.49,1453.49) 1587,1650 2454.04,1650 v1(2473.15,1630.89) ; v1@1390.49,1460.99 ccw(c1390.49,1479.09) 1403.29,1466.29 ccw(c1416.09,1453.49) v1@1397.99,1453.49 ; v1@2465.65,1630.89 ccw(c2447.54,1630.89) 2460.35,1643.69 ccw(c2473.15,1656.5) v1@2473.15,1638.39
SEL3_T: Q4.1 RN16.4 | length 306.9
  Top Layer w5: RN16.4@1387.29,1329.87 cw(c1382.57,1323.51) 1390.49,1323.51 ; RN16.4@1390.49,1346 1390.49,1323.51 ; RN16.4@1393.69,1329.87 ccw(c1398.41,1323.51) 1390.49,1323.51 ; Q4.1@1512.7,1243 ccw(c1475.28,1243) 1501.74,1269.46 ccw(c1528.2,1295.92) Q4.1@1528.2,1258.5 ; Q4.1@1517.7,1243 ccw(c1492.35,1243) 1510.28,1260.92 ccw(c1528.2,1278.85) Q4.1@1528.2,1253.5 ; Q4.1@1528.2,1243 1478.6,1292.6 1421.4,1292.6 1390.49,1323.51
SEL3_TT: Q4.3 U13.9 | length 437
  Top Layer w12: Q4.3@1490.2,1163 1490.2,1146.8 U13.9@1695,942 ; Q4.3@1502.2,1156 ccw(c1553.38,1156) 1517.19,1119.81 ; U13.9@1671,942 ccw(c1613.06,942) 1654.03,982.97 ccw(c1695,1023.94) U13.9@1695,966
SEL4: RN19.8 U3.P11 | length 1021.3
  Top Layer w5: v1@1687.7,1454.7 cw(c1674.89,1441.89) 1693,1441.89 cw(c1711.11,1441.89) v1@1698.3,1454.7 ; RN19.8@1690.2,1435.76 ccw(c1683.44,1442.52) 1693,1442.52 ; RN19.8@1693,1421.15 v1(1693,1460) ; 1693,1447.35 ccw(c1709.39,1447.35) RN19.8@1697.8,1435.76
  Top Layer w10: v1(2433.78,1630.89) U3.P11@2453.46,1650.57 ; v1@2433.78,1635.89 ccw(c2433.78,1647.96) 2442.31,1639.42 ccw(c2450.85,1630.89) v1@2438.78,1630.89 ; U3.P11@2448.62,1650.57 cw(c2436.93,1650.57) 2445.2,1642.31 cw(c2453.46,1634.04) U3.P11@2453.46,1645.73
  Mid-Layer 1 w5: v1(1693,1460) 1863.89,1630.89 v1(2433.78,1630.89) ; v1@1693,1467.5 ccw(c1693,1485.61) 1705.8,1472.8 ccw(c1718.61,1460) v1@1700.5,1460 ; v1@2428.48,1625.59 ccw(c2415.67,1612.78) 2415.67,1630.89 ccw(c2415.67,1649) v1@2428.48,1636.19
SEL4_T: Q5.1 RN19.1 | length 238.5
  Top Layer w5: Q5.1@1656.6,1243 1694,1280.4 RN19.1@1694,1347 ; Q5.1@1656.6,1253.5 ccw(c1656.6,1278.85) 1674.52,1260.92 ccw(c1692.45,1243) Q5.1@1667.1,1243 ; Q5.1@1656.6,1258.5 ccw(c1656.6,1295.92) 1683.06,1269.46 ccw(c1709.52,1243) Q5.1@1672.1,1243 ; RN19.1@1690.2,1331.39 cw(c1681.03,1322.22) 1694,1322.22 cw(c1706.97,1322.22) RN19.1@1697.8,1331.39
SEL4_TT: Q5.3 U13.8 | length 430.6
  Top Layer w12: Q5.3@1610.11,1147.51 cw(c1589.63,1127.03) 1618.6,1127.03 cw(c1647.57,1127.03) Q5.3@1627.09,1147.51 ; Q5.3@1618.6,1163 1618.6,1118.4 U13.8@1795,942 ; U13.8@1771,942 ccw(c1713.06,942) 1754.03,982.97 ccw(c1795,1023.94) U13.8@1795,966
SEL5: RN19.7 U3.M11 | length 1068.1
  Top Layer w5: v1@1720.7,1455.7 cw(c1707.89,1442.89) 1726,1442.89 cw(c1744.11,1442.89) v1@1731.3,1455.7 ; RN19.7@1721.7,1435.76 ccw(c1711.31,1446.15) 1726,1446.15 ; RN19.7@1726,1420.65 v1(1726,1461) ; 1726,1443.72 ccw(c1737.25,1443.72) RN19.7@1729.3,1435.76
  Top Layer w10: v1(2512.52,1630.89) U3.M11@2532.2,1650.57 ; v1@2512.52,1635.89 ccw(c2512.52,1647.96) 2521.05,1639.42 ccw(c2529.59,1630.89) v1@2517.52,1630.89 ; U3.M11@2527.36,1650.57 cw(c2515.67,1650.57) 2523.94,1642.31 cw(c2532.2,1634.04) U3.M11@2532.2,1645.73
  Mid-Layer 1 w5: v1(1726,1461) 1876,1611 2492.63,1611 v1(2512.52,1630.89) ; v1@1726,1468.5 ccw(c1726,1486.61) 1738.8,1473.8 ccw(c1751.61,1461) v1@1733.5,1461 ; v1@2505.02,1630.89 cw(c2486.91,1630.89) 2499.72,1618.09 cw(c2512.52,1605.28) v1@2512.52,1623.39
SEL5_T: Q6.1 RN19.2 | length 247.6
  Top Layer w5: RN19.2@1721.7,1331.39 cw(c1712.52,1322.22) 1725.5,1322.22 cw(c1738.47,1322.22) RN19.2@1729.3,1331.39 ; RN19.2@1725.5,1347 1725.5,1302.5 Q6.1@1785,1243 ; Q6.1@1769.5,1243 ccw(c1732.08,1243) 1758.54,1269.46 ccw(c1785,1295.92) Q6.1@1785,1258.5 ; Q6.1@1774.5,1243 ccw(c1749.15,1243) 1767.08,1260.92 ccw(c1785,1278.85) Q6.1@1785,1253.5
SEL5_TT: Q6.3 U13.5 | length 939.1
  Top Layer w12: Q6.3@1738.51,1147.51 cw(c1718.03,1127.03) 1747,1127.03 cw(c1775.97,1127.03) Q6.3@1755.49,1147.51 ; v2@1742.5,1125.79 ccw(c1735.63,1137.7) 1748.91,1134.14 ; 1744.17,1137.6 cw(c1730.9,1134.05) 1740.63,1124.35 ccw(c1725.27,1139.73) 1747,1139.73 ccw(c1768.73,1139.73) 1753.36,1124.36 cw(c1763.1,1134.05) 1749.83,1137.6 ; 1745.09,1134.14 ccw(c1758.37,1137.7) v2@1751.5,1125.79 ; v2(1747,1118) Q6.3@1747,1163
  Mid-Layer 1 w12: U13.5@1595,542 1747,694 v2(1747,1118) ; U13.5@1595,566 ccw(c1595,623.94) 1635.97,582.97 ccw(c1676.94,542) U13.5@1619,542 ; v2@1740.64,1111.64 cw(c1725.27,1096.27) 1747,1096.27 cw(c1768.73,1096.27) v2@1753.36,1111.64
T2: RN13.5 U3.T2 | length 1955.3
  Top Layer w5: RN13.5@541.15,2056.76 563,2056.76 ; RN13.5@552.96,2051.39 cw(c552.96,2014.18) 579.27,2040.49 ; RN13.5@552.96,2056.39 cw(c552.96,2031.25) 570.74,2049.02 ; RN13.5@552.96,2061.39 cw(c552.96,2048.32) 562.2,2057.56 ; RN13.5@557.43,2053.78 cw(c563,2050.07) 563,2056.76 ; RN13.5@557.43,2059.74 ccw(c563,2063.45) 563,2056.76 ; U3.T2@2369.53,1999.71 ccw(c2357,1987.18) 2357,2004.91 ccw(c2357,2022.63) U3.T2@2369.53,2010.1 ; U3.T2@2374.72,2004.91 614.86,2004.91 563,2056.76
T3: RN15.7 U3.T3 | length 1909.1
  Top Layer w5: RN15.7@541.15,1954.38 561.38,1954.38 ; RN15.7@553.03,1954.75 ccw(c555.55,1968.96) 565.75,1958.75 ; RN15.7@553.9,1959.67 ccw(c557.59,1980.48) 572.53,1965.53 ; RN15.7@557.84,1952.12 cw(c561.38,1950.47) 561.38,1954.38 ; RN15.7@557.84,1956.64 ccw(c561.38,1958.28) 561.38,1954.38 ; U3.T3@2369.53,1960.34 ccw(c2357,1947.81) 2357,1965.54 ccw(c2357,1983.26) U3.T3@2369.53,1970.73 ; U3.T3@2374.72,1965.54 572.54,1965.54 ; 561.38,1954.38 572.54,1965.54
T4: RN15.5 U3.T4 | length 1931.5
  Top Layer w5: RN15.5@541.15,1891.39 562,1891.39 ; RN15.5@552.96,1891.76 ccw(c552.96,1914.49) 569.03,1898.42 ; RN15.5@552.96,1896.76 ccw(c552.96,1931.56) 577.57,1906.95 ; RN15.5@557.68,1888.82 cw(c562,1886.47) 562,1891.39 ; RN15.5@557.68,1893.95 ccw(c562,1896.3) 562,1891.39 ; U3.T4@2369.53,1920.97 ccw(c2357,1908.44) 2357,1926.17 ccw(c2357,1943.89) U3.T4@2369.53,1931.36 ; U3.T4@2374.72,1926.17 596.78,1926.17 562,1891.39
T5: RN17.7 U3.T5 | length 1939.5
  Top Layer w5: RN17.7@541.15,1789 560,1789 657.8,1886.8 U3.T5@2374.72,1886.8 ; RN17.7@552.96,1789.38 ccw(c552.96,1807.28) 565.62,1794.62 ; RN17.7@552.96,1794.38 ccw(c552.96,1824.36) 574.16,1803.16 ; U3.T5@2369.53,1881.6 ccw(c2357,1869.07) 2357,1886.8 ccw(c2357,1904.52) U3.T5@2369.53,1891.99
T6: RN17.5 U3.T6 | length 1967.4
  Top Layer w5: RN17.5@541.15,1726.01 562,1726.01 ; RN17.5@552.96,1726.39 ccw(c552.96,1749.11) 569.03,1733.04 ; RN17.5@552.96,1731.39 ccw(c552.96,1766.18) 577.57,1741.58 ; RN17.5@557.68,1723.44 cw(c562,1721.1) 562,1726.01 ; RN17.5@557.68,1728.58 ccw(c562,1730.93) 562,1726.01 ; U3.T6@2369.53,1842.23 ccw(c2357,1829.7) 2357,1847.43 ccw(c2357,1865.15) U3.T6@2369.53,1852.62 ; U3.T6@2374.72,1847.43 683.41,1847.43 562,1726.01
T7: RN18.7 U3.T7 | length 1985.7
  Top Layer w5: RN18.7@549,1623.63 562,1623.63 ; RN18.7@552.96,1624 ccw(c552.96,1646.73) 569.03,1630.66 ; RN18.7@552.96,1629 ccw(c552.96,1663.8) 577.57,1639.19 ; RN18.7@557.68,1621.06 cw(c562,1618.71) 562,1623.63 ; RN18.7@557.68,1626.2 ccw(c562,1628.54) 562,1623.63 ; U3.T7@2369.53,1802.86 ccw(c2357,1790.33) 2357,1808.06 ccw(c2357,1825.78) U3.T7@2369.53,1813.25 ; U3.T7@2374.72,1808.06 746.43,1808.06 562,1623.63
T8: RN18.5 U3.T8 | length 2003.3
  Top Layer w5: RN18.5@541.15,1560.64 562,1560.64 ; RN18.5@552.96,1561.01 ccw(c552.96,1583.74) 569.03,1567.67 ; RN18.5@552.96,1566.01 ccw(c552.96,1600.81) 577.57,1576.2 ; RN18.5@557.68,1558.07 cw(c562,1555.72) 562,1560.64 ; RN18.5@557.68,1563.2 ccw(c562,1565.55) 562,1560.64 ; U3.T8@2369.53,1763.49 ccw(c2357,1750.96) 2357,1768.68 ccw(c2357,1786.41) U3.T8@2369.53,1773.88 ; U3.T8@2374.72,1768.68 770.05,1768.68 562,1560.64
T9: RN20.7 U3.T9 | length 2046.1
  Top Layer w5: RN20.7@541.15,1458.25 563,1458.25 ; RN20.7@552.96,1453.63 ccw(c552.96,1466.7) 562.2,1457.46 ; RN20.7@552.96,1458.63 ccw(c552.96,1483.77) 570.74,1465.99 ; RN20.7@552.96,1463.63 ccw(c552.96,1500.84) 579.27,1474.53 ; RN20.7@557.43,1455.27 cw(c563,1451.56) 563,1458.25 ; RN20.7@557.43,1461.23 ccw(c563,1464.94) 563,1458.25 ; U3.T9@2369.53,1724.12 ccw(c2357,1711.59) 2357,1729.32 ccw(c2357,1747.04) U3.T9@2369.53,1734.51 ; U3.T9@2374.72,1729.32 834.06,1729.32 563,1458.25
T10: RN20.5 U3.T10 | length 2055.9
  Top Layer w5: RN20.5@541.15,1395.26 563,1395.26 ; RN20.5@552.96,1390.64 ccw(c552.96,1403.7) 562.2,1394.46 ; RN20.5@552.96,1395.64 ccw(c552.96,1420.78) 570.74,1403 ; RN20.5@552.96,1400.64 ccw(c552.96,1437.85) 579.27,1411.53 ; RN20.5@557.43,1392.28 cw(c563,1388.57) 563,1395.26 ; RN20.5@557.43,1398.24 ccw(c563,1401.95) 563,1395.26 ; U3.T10@2369.53,1684.75 ccw(c2357,1672.22) 2357,1689.94 ccw(c2357,1707.67) U3.T10@2369.53,1695.14 ; U3.T10@2374.72,1689.94 857.68,1689.94 563,1395.26
T11: RN21.7 U3.T11 | length 2058.8
  Top Layer w5: RN21.7@541.15,1292.88 561,1292.88 ; RN21.7@552.96,1293.25 ccw(c552.96,1313.56) 567.32,1299.2 ; RN21.7@552.96,1298.25 ccw(c552.96,1330.63) 575.86,1307.74 ; RN21.7@557.93,1290.82 cw(c561,1289.55) 561,1292.88 ; RN21.7@557.93,1294.93 ccw(c561,1296.2) 561,1292.88 ; U3.T11@2369.53,1645.38 ccw(c2357,1632.85) 2357,1650.57 ccw(c2357,1668.3) U3.T11@2369.53,1655.77 ; U3.T11@2374.72,1650.57 918.7,1650.57 561,1292.88
T12: RN21.5 U3.T12 | length 2075.1
  Top Layer w5: RN21.5@541.15,1229.89 562,1229.89 ; RN21.5@552.96,1230.26 ccw(c552.96,1252.99) 569.03,1236.92 ; RN21.5@552.96,1235.26 ccw(c552.96,1270.06) 577.57,1245.45 ; RN21.5@557.68,1227.32 cw(c562,1224.97) 562,1229.89 ; RN21.5@557.68,1232.45 ccw(c562,1234.8) 562,1229.89 ; U3.T12@2369.53,1606.01 ccw(c2357,1593.48) 2357,1611.2 ccw(c2357,1628.93) U3.T12@2369.53,1616.4 ; U3.T12@2374.72,1611.2 943.32,1611.2 562,1229.89
T13: RN22.7 U3.T13 | length 2101.2
  Top Layer w5: RN22.7@541.15,1127.5 562,1127.5 ; RN22.7@552.96,1127.88 ccw(c552.96,1150.6) 569.03,1134.53 ; RN22.7@552.96,1132.88 ccw(c552.96,1167.67) 577.57,1143.07 ; RN22.7@557.68,1124.94 cw(c562,1122.59) 562,1127.5 ; RN22.7@557.68,1130.07 ccw(c562,1132.42) 562,1127.5 ; U3.T13@2369.53,1566.64 ccw(c2357,1554.11) 2357,1571.83 ccw(c2357,1589.56) U3.T13@2369.53,1577.03 ; U3.T13@2374.72,1571.83 1006.33,1571.83 562,1127.5
T14: RN22.5 U3.T14 | length 2104.5
  Top Layer w5: RN22.5@541.15,1064.51 561,1064.51 ; RN22.5@552.96,1064.89 ccw(c552.96,1085.2) 567.32,1070.83 ; RN22.5@552.96,1069.89 ccw(c552.96,1102.27) 575.86,1079.37 ; RN22.5@557.93,1062.46 cw(c561,1061.19) 561,1064.51 ; RN22.5@557.93,1066.57 ccw(c561,1067.84) 561,1064.51 ; U3.T14@2369.53,1527.27 ccw(c2357,1514.74) 2357,1532.46 ccw(c2357,1550.19) U3.T14@2369.53,1537.66 ; U3.T14@2374.72,1532.46 1028.95,1532.46 561,1064.51
TCK: D4.3 J3.1 R6.2 U3.H3 | length 3157.4
  Top Layer w5: J3.1@1686,3343 1735,3392 ; J3.1@1687.12,3359.46 ccw(c1689.27,3391.06) 1711.67,3368.67 ccw(c1734.06,3346.27) J3.1@1702.46,3344.12 ; J3.1@1687.46,3364.45 ccw(c1690.26,3405.63) 1719.44,3376.44 ccw(c1748.63,3347.26) J3.1@1707.45,3344.46 ; J3.1@1687.8,3369.44 ccw(c1691.25,3420.19) 1727.22,3384.22 ccw(c1763.19,3348.25) J3.1@1712.44,3344.8 ; J3.1@1688.14,3374.43 ccw(c1692.24,3434.75) 1735,3392 ; J3.1@1717.43,3345.14 cw(c1777.75,3349.24) 1735,3392 ; v1@2143.7,3386.7 ccw(c2130.89,3373.89) 2130.89,3392 ccw(c2130.89,3410.11) v1@2143.7,3397.3 ; v1(2149,3392) 1735,3392
  Top Layer w10: U3.H3@2689.68,1965.54 v1(2709.37,1985.22) ; U3.H3@2689.68,1970.38 ccw(c2689.68,1982.07) 2697.95,1973.8 ccw(c2706.22,1965.54) U3.H3@2694.53,1965.54 ; v1@2704.37,1985.22 cw(c2692.3,1985.22) 2700.84,1976.69 cw(c2709.37,1968.15) v1@2709.37,1980.22
  Bottom Layer w5: v1@2143.7,3386.7 cw(c2130.89,3373.89) 2149,3373.89 cw(c2167.11,3373.89) v1@2154.3,3386.7 ; v1(2149,3392) 2149,3279 2709.37,2718.63 v1(2709.37,1985.22) ; v1@2704.07,1990.52 ccw(c2691.26,2003.33) 2709.37,2003.33 ccw(c2727.48,2003.33) v1@2714.67,1990.52
  Bottom Layer w15: D4.3@1445,3163.67 1517.67,3163.67 R6.2@1524,3170 1685.67,3331.67 1686,3331.67 J3.1@1686,3343 ; D4.3@1459.42,3156.24 cw(c1477.35,3138.32) 1477.35,3163.67 cw(c1477.35,3189.02) D4.3@1459.42,3171.09 ; 1488.19,3163.67 ccw(c1488.19,3205.81) R6.2@1517.99,3176.01 ; R6.2@1524,3178.5 ccw(c1524,3199.02) 1538.51,3184.51 ccw(c1553.02,3170) R6.2@1532.5,3170 ; 1632.98,3278.98 ccw(c1568.97,3343) J3.1@1659.5,3343 ; 1658.59,3304.59 ccw(c1620.18,3343) J3.1@1674.5,3343 ; 1659.54,3305.54 cw(c1686,3279.08) J3.1@1686,3316.5
TDI: D2.3 J3.9 R8.2 U3.H4 | length 3327.1
  Top Layer w10: U3.H4@2689.68,1926.17 v1(2709.37,1945.85) ; U3.H4@2689.68,1931.01 ccw(c2689.68,1942.7) 2697.95,1934.43 ccw(c2706.22,1926.17) U3.H4@2694.53,1926.17 ; v1@2704.37,1945.85 cw(c2692.3,1945.85) 2700.84,1937.32 cw(c2709.37,1928.78) v1@2709.37,1940.85
  Bottom Layer w5: J3.9@2082.5,3343 ccw(c2134.41,3343) 2097.7,3306.3 ; J3.9@2086,3311.5 cw(c2086,3295.81) 2097.1,3306.9 ; J3.9@2086,3343 2086,3318 2691,2713 2691,1964.22 v1(2709.37,1945.85) ; J3.9@2087.5,3343 ccw(c2151.48,3343) 2106.24,3297.76 ; J3.9@2092.5,3343 ccw(c2168.55,3343) 2114.77,3289.23 ; J3.9@2097.5,3343 ccw(c2185.62,3343) 2123.31,3280.69 ; J3.9@2102.5,3343 ccw(c2202.69,3343) 2131.84,3272.16 ; J3.9@2107.5,3343 ccw(c2219.76,3343) 2140.38,3263.62 ; J3.9@2112.5,3343 ccw(c2236.83,3343) 2148.92,3255.08 ; J3.9@2117.5,3343 ccw(c2253.9,3343) 2157.45,3246.55
  Bottom Layer w15: D2.3@1445,3423 1524,3423 R8.2@1524,3419 1624,3519 1985,3519 2038,3466 2038,3391 J3.9@2086,3343 ; D2.3@1459.42,3415.58 cw(c1477.35,3397.65) 1477.35,3423 cw(c1477.35,3448.35) D2.3@1459.42,3430.42 ; 1493.82,3423 cw(c1493.82,3388.82) R8.2@1517.99,3412.99 ; R8.2@1524,3427.5 ccw(c1524,3448.02) 1538.51,3433.51 ccw(c1553.02,3419) R8.2@1532.5,3419 ; J3.9@2059.5,3343 ccw(c1995.52,3343) 2040.76,3388.24 ccw(c2086,3433.48) J3.9@2086,3369.5
TDO: D3.3 J3.3 U3.J4 | length 2965.4
  Top Layer w10: v1@2630.63,1940.85 cw(c2630.63,1928.78) 2639.16,1937.32 cw(c2647.7,1945.85) v1@2635.63,1945.85 ; v1(2630.63,1945.85) U3.J4@2650.32,1926.17 ; U3.J4@2645.47,1926.17 ccw(c2633.78,1926.17) 2642.05,1934.43 ccw(c2650.32,1942.7) U3.J4@2650.32,1931.01
  Bottom Layer w5: J3.3@1786,3311.5 cw(c1786,3235.45) 1839.77,3289.23 cw(c1893.55,3343) J3.3@1817.5,3343 ; J3.3@1786,3316.5 cw(c1786,3252.52) 1831.24,3297.76 cw(c1876.48,3343) J3.3@1812.5,3343 ; J3.3@1786,3321.5 cw(c1786,3269.59) 1822.7,3306.3 cw(c1859.41,3343) J3.3@1807.5,3343 ; J3.3@1786,3326.5 cw(c1786,3286.67) 1814.17,3314.83 cw(c1842.33,3343) J3.3@1802.5,3343 ; J3.3@1786,3343 1869,3260 2085,3260 2649,2696 2649,1964.22 v1(2630.63,1945.85)
  Bottom Layer w15: D3.3@1445,3034 1542,3034 1786,3278 J3.3@1786,3343 ; D3.3@1459.42,3026.58 cw(c1477.35,3008.65) 1477.35,3034 cw(c1477.35,3059.35) D3.3@1459.42,3041.42 ; J3.3@1767.26,3324.26 cw(c1722.02,3279.02) 1786,3279.02 cw(c1849.98,3279.02) J3.3@1804.74,3324.26
TMS: D1.3 J3.5 R15.2 U3.J5 | length 3003.9
  Top Layer w10: v1@2630.63,1901.48 cw(c2630.63,1889.41) 2639.16,1897.95 cw(c2647.7,1906.48) v1@2635.63,1906.48 ; v1(2630.63,1906.48) U3.J5@2650.32,1886.8 ; U3.J5@2645.47,1886.8 ccw(c2633.78,1886.8) 2642.05,1895.06 ccw(c2650.32,1903.33) U3.J5@2650.32,1891.64
  Bottom Layer w5: J3.5@1886,3311.5 cw(c1886,3235.45) 1939.77,3289.23 cw(c1993.55,3343) J3.5@1917.5,3343 ; J3.5@1886,3316.5 cw(c1886,3252.52) 1931.24,3297.76 cw(c1976.48,3343) J3.5@1912.5,3343 ; J3.5@1886,3321.5 cw(c1886,3269.59) 1922.7,3306.3 cw(c1959.41,3343) J3.5@1907.5,3343 ; J3.5@1886,3326.5 cw(c1886,3286.67) 1914.17,3314.83 cw(c1942.33,3343) J3.5@1902.5,3343 ; J3.5@1886,3343 1944,3285 2088,3285 2674,2699 2674,1949.85 v1(2630.63,1906.48)
  Bottom Layer w15: D1.3@1445,3293.33 1523.33,3293.33 R15.2@1524,3294 1625,3395 1834,3395 J3.5@1886,3343 ; D1.3@1459.42,3285.91 cw(c1477.35,3267.98) 1477.35,3293.33 cw(c1477.35,3318.68) D1.3@1459.42,3300.76 ; 1501.87,3293.33 ccw(c1501.87,3316.13) R15.2@1517.99,3300.01 ; 1505.09,3293.33 cw(c1505.09,3275.09) R15.2@1517.99,3287.99 ; R15.2@1524,3302.5 ccw(c1524,3323.02) 1538.51,3308.51 ccw(c1553.02,3294) R15.2@1532.5,3294 ; J3.5@1859.5,3343 ccw(c1795.52,3343) 1840.76,3388.24 ccw(c1886,3433.48) J3.5@1886,3369.5
TXD: R4.1 U3.N1 U4.25 | length 2629.5
  Top Layer w5: U4.25@789.21,2705.73 923.27,2705.73 1273,2356 2292,2356 2492.83,2155.17 U3.N1@2492.83,2044.28 ; U4.25@809.51,2703.74 cw(c814.32,2698.94) 814.32,2705.73 cw(c814.32,2712.53) U4.25@809.51,2707.72 ; R4.1@1097.45,2690.75 cw(c1043.02,2636.32) 1120,2636.32 ; R4.1@1100.99,2694.29 cw(c1055.09,2648.39) 1120,2648.39 ; R4.1@1104.53,2697.82 cw(c1067.17,2660.46) 1120,2660.46 ; 1105.78,2523.22 cw(c1089.57,2507) v1@1112.5,2507 ; R4.1@1107,2700.3 1120,2687.3 v1(1120,2582) ; R4.1@1108.06,2701.36 cw(c1079.24,2672.54) 1120,2672.54 ; 1110.61,2518.39 ccw(c1120,2527.78) v1@1120,2514.5 ; R4.1@1111.6,2704.9 cw(c1091.31,2684.61) R4.1@1120,2684.61 ; v1@1114.7,2587.3 ccw(c1101.89,2600.11) 1120,2600.11 ccw(c1138.11,2600.11) v1@1125.3,2587.3 ; v1@1120,2499.5 cw(c1120,2476.57) 1136.22,2492.78 ; v1@1127.5,2507 ccw(c1140.78,2507) 1131.39,2497.61 ; U3.N1@2487.64,2049.47 ccw(c2475.11,2062) 2492.83,2062 ccw(c2510.56,2062) U3.N1@2498.03,2049.47
  Bottom Layer w5: v1@1114.7,2512.3 ccw(c1101.89,2525.11) 1120,2525.11 ccw(c1138.11,2525.11) v1@1125.3,2512.3 ; v1@1114.7,2576.7 cw(c1101.89,2563.89) 1120,2563.89 cw(c1138.11,2563.89) v1@1125.3,2576.7 ; v1(1120,2507) v1(1120,2582)
VBUS: F1.1 J6.1 U2.5 | length 54.6
  Bottom Layer w19: U2.5@801,3082.4 v2(855.6,3082.4)
VCC: C21.1 C45.1 EC2.1 EC3.1 J1.2 J2.2 P2.2 SW1.3 SW1.6 U1.3 U4.7 U4.8 U6.3 | length 9649.6
  Top Layer w40: SW1.3@1240.63,3271.37 ccw(c1210.75,3301.25) 1253,3301.25 ccw(c1295.25,3301.25) SW1.3@1265.37,3271.37 ; SW1.6@1240.63,3461.19 cw(c1210.75,3431.32) 1253,3431.32 cw(c1295.25,3431.32) SW1.6@1265.37,3461.19 ; SW1.3@1253,3259 SW1.6@1253,3473.57
  Top Layer w60: SW1.3@1253,3259 2301,3259 2477,3435 4607,3435 5001,3041 J2.2@5001,2721.65
  Mid-Layer 1 w20: P2.2@889,2503 997,2611 1569,2611 v1(1621,2663) ; P2.2@889,2522.53 ccw(c889,2569.67) 922.34,2536.34 ccw(c955.67,2503) P2.2@908.53,2503
  Mid-Layer 1 w40: 91.98,846.67 cw(c66.97,821.65) J1.2@102.35,821.65 ; J1.2@117,821.65 38,900.65 38,2816 v2(577,2816) 1253,2816 SW1.3@1253,3259 SW1.6@1253,3473.57 ; SW1.3@1240.63,3246.63 cw(c1210.75,3216.75) 1253,3216.75 cw(c1295.25,3216.75) SW1.3@1265.37,3246.63 ; SW1.3@1240.63,3271.37 ccw(c1210.75,3301.25) 1253,3301.25 ccw(c1295.25,3301.25) SW1.3@1265.37,3271.37 ; SW1.6@1240.63,3461.19 cw(c1210.75,3431.32) 1253,3431.32 cw(c1295.25,3431.32) SW1.6@1265.37,3461.19
  other v1: 2000,2660 1649,2662 2000,2689 1651,2693 1621,2694 1999,2720 1620,2725 1650,2725 1999,2754